# Altium PCB SAMC21_one.PcbDoc
Units mil, origin at the board's own origin, x right, y up, seen from the top; angles counter-clockwise.
Board outline 2362.2 x 1574.8 mil, 2 copper layers (Top Layer, Bottom Layer); 53 components, 42 nets, 180 pads, 43 vias.
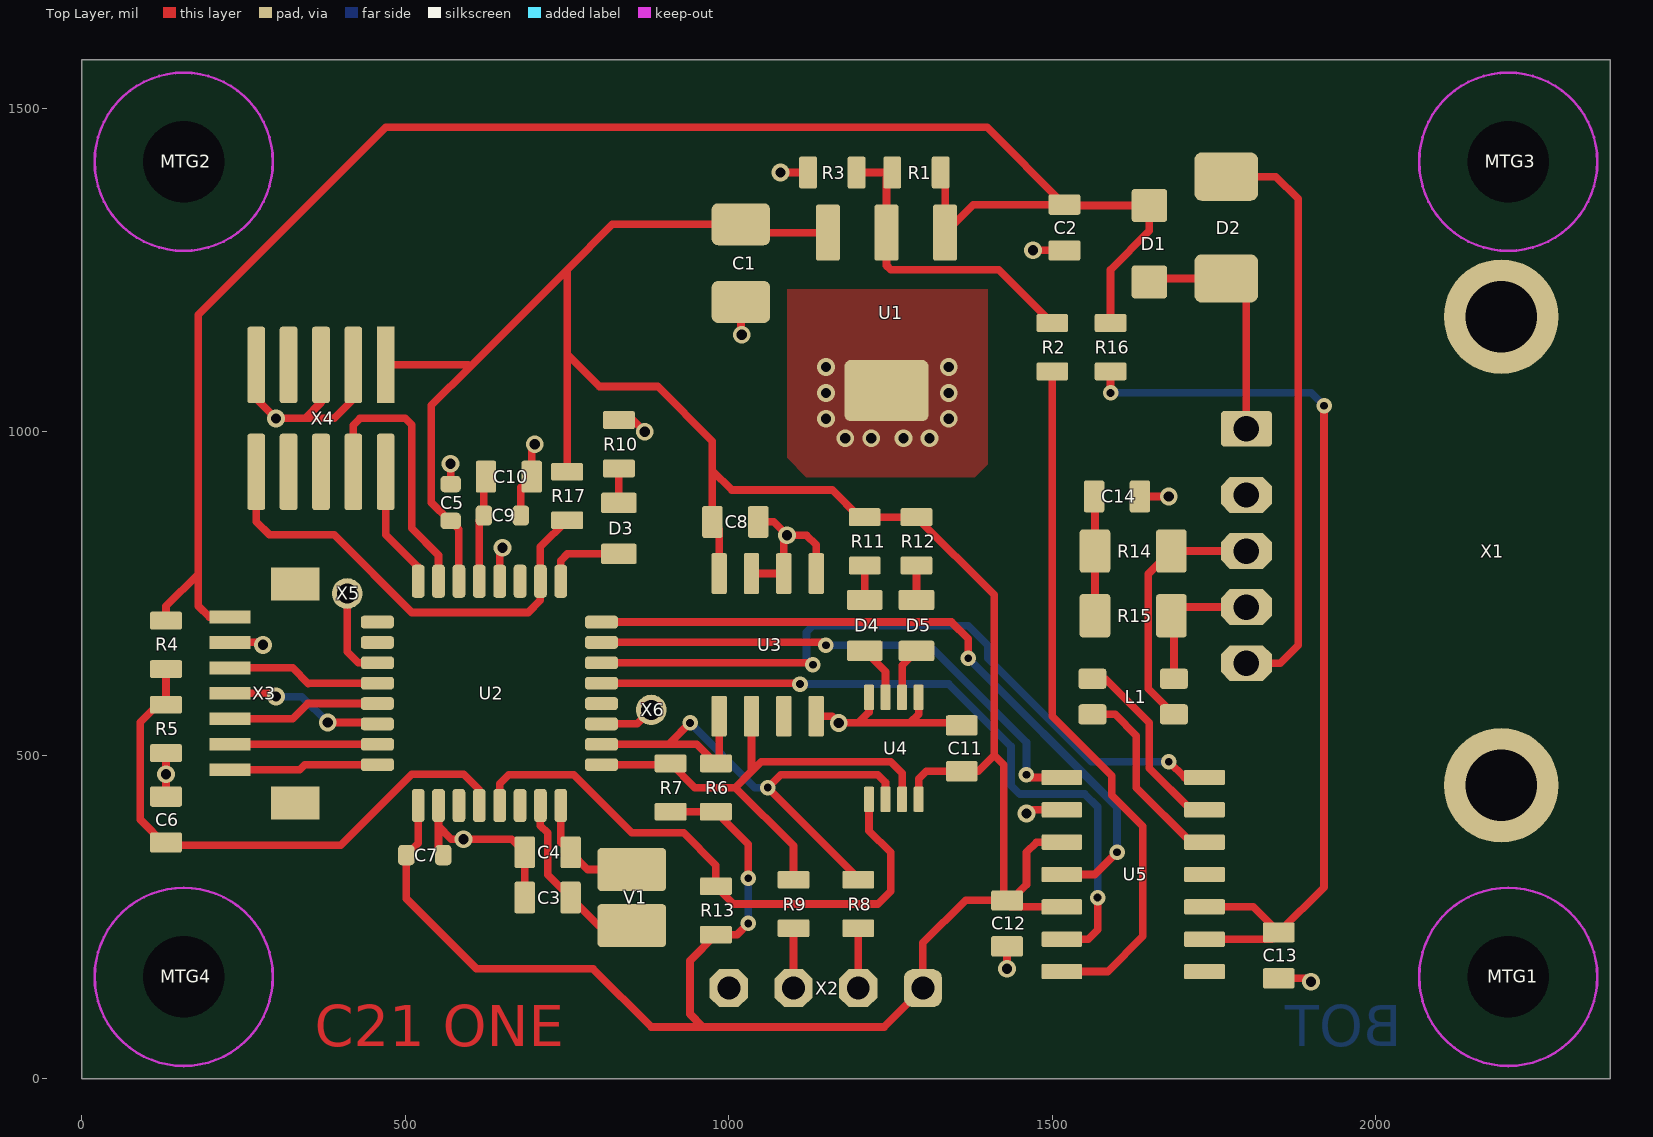
[diagram p0: Top Layer view]
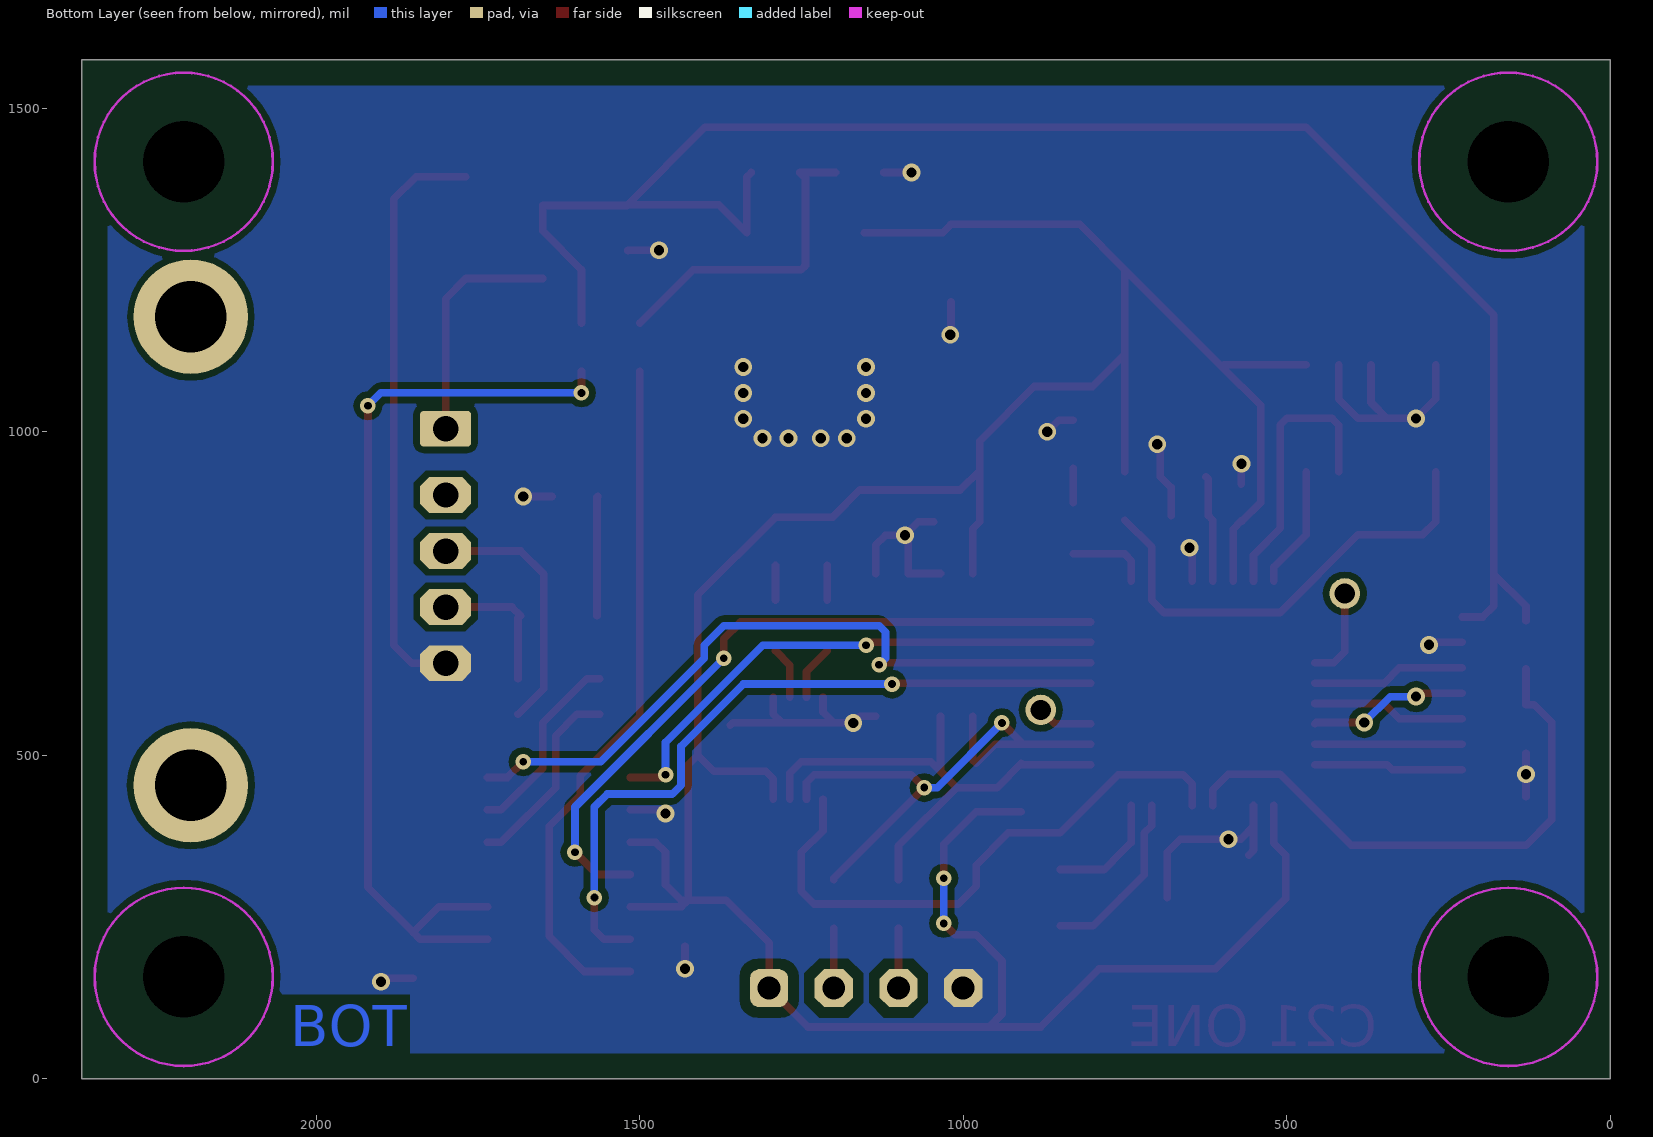
[diagram p1: Bottom Layer view, seen from below]
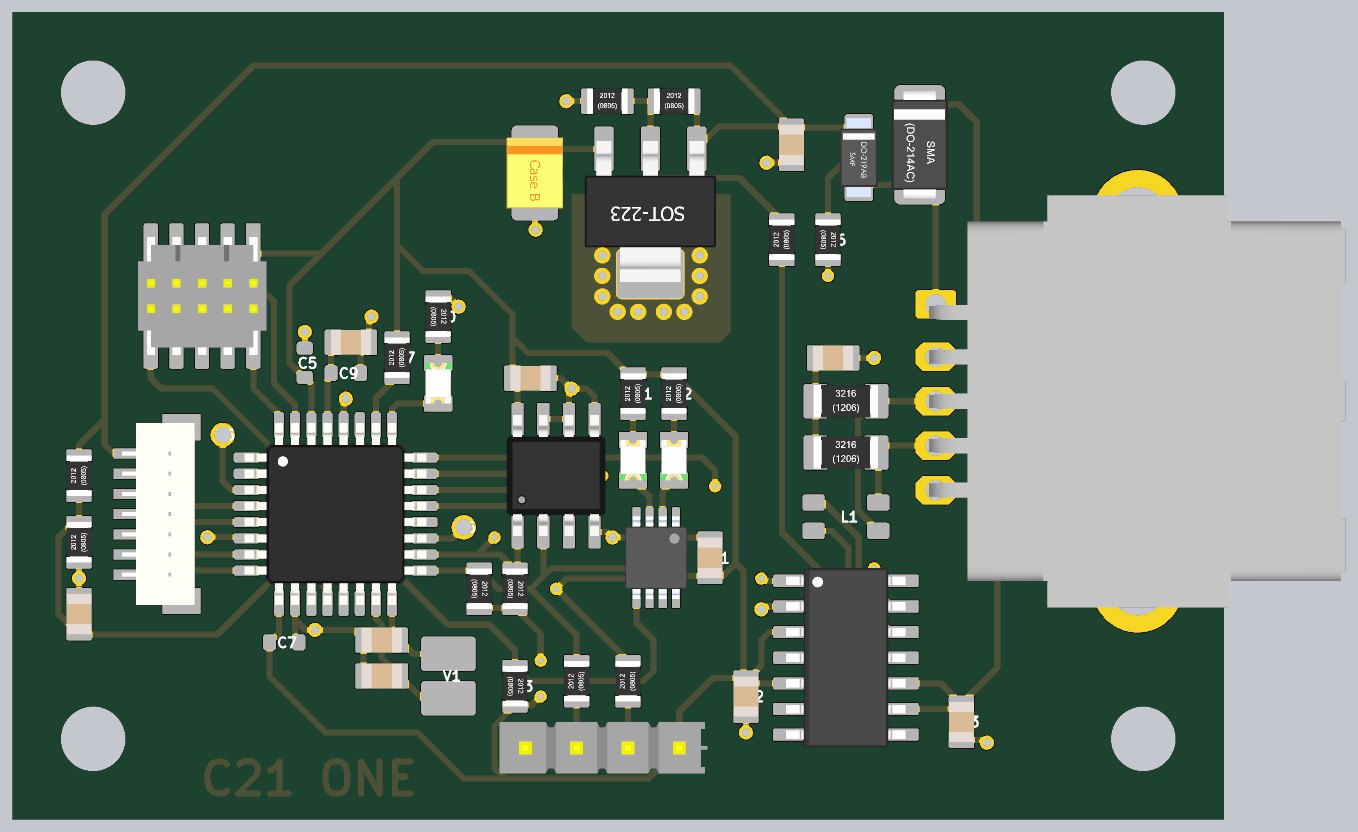
[diagram p2: 3D render of the assembled board from above, using the file's embedded part models]

## Layer stack, top to bottom
Top Solder: solder mask 0.4, Solder Resist, Dk 3.5
Top Layer: signal copper 1.4
Dielectric 1: dielectric 12.6, FR-4, Dk 4.8
Bottom Layer: signal copper 1.4
Bottom Solder: solder mask 0.4, Solder Resist, Dk 3.5

## Board outline
0,0 0,1574.8 2362.2,1574.8 2362.2,0

## Design rules (kind name [scope] priority, off if disabled: settings)
BoardOutlineClearance [All] p1: gap=39.37 ignorepadtopadclearanceinfootprint=FALSE except(59.06: THPad-OutlineEdge THPad-CavityEdge THPad-CutoutEdge THPad-SplitBarrior THPad-SplitContinuation)
Clearance [All] p1: gap=6 ignorepadtopadclearanceinfootprint=FALSE except(0: Arc-Hole Track-Hole SMDPad-Hole THPad-Hole Via-Hole Fill-Hole Poly-Hole Region-Hole Text-Hole; 10: Arc-Poly Track-Poly SMDPad-Poly THPad-Poly Via-Poly Fill-Poly Poly-Poly) // 1
HoleSize [All] p1: absolutevalues=TRUE maxlimit=472.44 minlimit=11.81 maxpercent=80.000 minpercent=20.000
MinimumSolderMaskSliver [All] p1: minsoldermaskwidth=2
PasteMaskExpansion [All] p1 off: expansion=0
PolygonConnect [All] p1: connectstyle=Direct reliefconductorwidth=16 reliefentries=4 polygonreliefangle="90 Angle" airgapwidth=10
RoutingVias [All] p1: holewidth=15.75 width=27.56 viastyle="Through Hole" minholewidth=11.81 minwidth=23.62 maxholewidth=314.96 maxwidth=393.7
SilkToBoardRegionClearance [All] p1 off:
SilkToSilkClearance [All] p1 off: silktosilkclearance=10
SilkToSolderMaskClearance [IsPad] p1 off: minsilkscreentomaskgap=10 clearancetoexposedcopper=TRUE
SolderMaskExpansion SolderMaskExpansion_VIA [IsVia] p1: expansion=2 soldermaskfromhole=TRUE
SolderMaskExpansion [All] p2: expansion=2
Width [All] p1: maxlimit=32 minlimit=8 preferedwidth=16 minimp=50.000000 maximp=50.000000 favimp=50.000000
24 further rules are at their usual default settings.

## Components (designator, comment, footprint, x,y, rotation, side; value= is the part's Value field where it differs from the comment)
C1 "tbd" CAPMP3528X21N 1018.7,1260.63 r270 top
C2 "100n/OM" CAPC2012X14L 1518.7,1315.63 r90 top
C3 "12p" CAPC2012X14L 720,280 r180 top
C4 "12p" CAPC2012X14L 720,350 r180 top
C5 "100n" CAPC1608X09L 570,890.63 r270 top
C6 "10n" CAPC2012X14L 130,400.63 r270 top
C7 "100n" CAPC1608X09L 530,345.63 r180 top
C8 "tbd" CAPC2012X14L 1010,860.63 r180 top
C9 "100n" CAPC1608X09L 650,870.63 r180 top
C10 "4µ7" CAPC2012X14L 660,930.63 r180 top
C11 "tbd" CAPC2012X14L 1360,510.63 r270 top
C12 "100n" CAPC2012X14L 1430,240 r90 top
C13 "100n" CAPC2012X14L 1850,190.63 r90 top
C14 "4n7" CAPC2012X14L 1600,900 r180 top
D1 "ES07D" DIOM2818X11N 1650,1290.63 r270 top
D2 "SMAJ36CA" DIOM5226X23N 1768.7,1315.63 r270 top
D3 "green" DIOC2012X10N 830,850.63 r270 top
D4 "tbd" DIOC2012X10N 1210,700.63 r90 top
D5 "tbd" DIOC2012X10N 1290,700.63 r90 top
L1 "ACT1210-101-2P-TL00" ACT1210 1625,590.63 r180 top
MTG1 "MH_M3" HOLE_3_2MM 2204.72,157.48 r0 top
MTG2 "MH_M3" HOLE_3_2MM 157.48,1417.32 r0 top
MTG3 "MH_M3" HOLE_3_2MM 2204.72,1417.32 r0 top
MTG4 "MH_M3" HOLE_3_2MM 157.48,157.48 r0 top
R1 "dnp" RESC2012X06L 1290,1400.63 r0 top
R2 "1k" RESC2012X06L 1500,1130.63 r90 top
R3 "dnp" RESC2012X06L 1160,1400.63 r0 top
R4 "100k" RESC2012X06L 130,670.63 r90 top
R5 "62k" RESC2012X06L 130,540.63 r90 top
R6 "tbd" RESC2012X06L 980,450 r270 top
R7 "tbd" RESC2012X06L 910,450 r270 top
R8 "tbd" RESC2012X06L 1200,270 r90 top
R9 "tbd" RESC2012X06L 1100,270 r90 top
R10 "1k" RESC2012X06L 830,980.63 r270 top
R11 "1k" RESC2012X06L 1210,830.63 r90 top
R12 "1k" RESC2012X06L 1290,830.63 r90 top
R13 "tbd" RESC2012X06L 980,260 r270 top
R14 "62R" RESC3216X07N 1625,815.63 r0 top
R15 "62R" RESC3216X07N 1625,715.63 r0 top
R16 "1k" RESC2012X06L 1590,1130.63 r270 top
R17 "10k" RESC2012X06L 750,900.63 r90 top
U1 "TLE4266-2G" SOT230P700X180-4N 1243.7,1185.63 r270 top
U2 "ATSAMC21E18A-AU" TQFP80P900X900X120-32N 630,595.63 r0 top
U3 "AT30TSE754ASS8M" SOIC127P600X175-8N 1060,670.63 r90 top
U4 "PCA9530D" TSOP65P640X120-8N 1255,510.63 r270 top
U5 "TJA1043" SOIC127P600X175-14N 1625,315.63 r0 top
V1 "16MHz" NX3225Gx 850,280 r270 top
X1 "MX34005" MX34005 1800,815.63 r270 top
X2 "1x4 2,54mm" PINH_1x04_2_54mm 1150,140 r180 top
X3 "BM07B-SRSS-TB" BM07B-SRSS-TB 280,595.63 r270 top
X4 "SWD" FTSH-105-01-L-DV-K 370,1020.63 r180 top
X5 "0.35mm²" PAD035X160 410,750 r0 top
X6 "0.35mm²" PAD035X160 880,570 r0 top

## Footprints (in the part's own frame and the unit in brackets; to place one, negate y for a bottom-side part, rotate by r counter-clockwise, add the part's x,y. Pads: shape width x height; smd on the part's side, far side on the other; paste and mask are expansions set on the pad)
ACT1210 [mm]
  rrect30% 1.1x0.8 smd: 1(-1.6,0.7) 2(-1.6,-0.7) 3(1.6,-0.7) 4(1.6,0.7)
  body extent -1.6,-1.3 1.6,1.3, height 2.5
BM07B-SRSS-TB [mm] "1.0mm pitch/Disconnectable Crimp style connector"
  rect 0.5x1.6 smd: 1(-3,-1.3) 2(-2,-1.3) 3(-1,-1.3) 4(0,-1.3) 5(1,-1.3) 6(2,-1.3) 7(3,-1.3)
  rect 1.3x1.9 smd: M(-4.3,1.262) M(4.3,1.262)
  body extent -4.5,-1.69 4.5,1.91, height 4.32
CAPC1608X09L [mm] "Chip Capacitor, 2-Leads, Body 1,6x0,8mm, IPC High Density"
  rrect50% 0.65x0.8 smd: 1(-0.725,0) 2(0.725,0)
  body extent -0.8,-0.4 0.8,0.4, height 0.9
CAPC2012X14L [mm] "Chip Capacitor, 2-Leads, Body 2,0x1,3mm, IPC High Density"
  rrect20% 0.8x1.25 smd: 1(-0.9,0) 2(0.9,0)
  body extent -1,-0.62 1,0.62, height 0.6
CAPMP3528X21N [mm] "Molded Capacitor, 2-Leads, Body 3,5x2,8mm, IPC Medium Density"
  rrect30% 1.65x2.3 smd: 1(-1.525,0) 2(1.525,0)
  body extent -1.75,-1.4 1.75,1.4, height 1.9
DIOC2012X10N [mm] "Chip Diode, 2-Leads, Body 2,0x1,3mm, IPC Medium Density"
  rrect20% 0.8x1.4 smd: 1(-1,0) 2(1,0)
  body extent -1,-0.62 1,0.63, height 0.7
DIOM2818X11N [mm] "Molded Diode, 2-Leads, Body 2,80x1,80mm, IPC Medium Density"
  rrect20% 1.3x1.4 smd: 1(-1.5,0) 2(1.5,0)
  body extent -1.95,-0.95 1.95,0.95, height 1.25
DIOM5226X23N [mm] "Molded Diode, 2-Leads, Body 5.2x2.6mm, IPC Medium Density"
  rrect30% 1.9x2.5 smd: 1(-2,0) 2(2,0)
  body extent -2.75,-1.4 2.75,1.4, height 2.6
FTSH-105-01-L-DV-K [mm] "SAMTEC FTSH 5pin doppelreihig, 1,27mm x 1,27mm"
  rect 0.7x3 smd: 1(-2.53,-2.1)
  rrect30% 0.7x3 smd: 2(-2.53,2.1) 3(-1.26,-2.1) 4(-1.26,2.1) 5(0.01,-2.1) 6(0.01,2.1) 7(1.28,-2.1) 8(1.28,2.1) 9(2.55,-2.1) 10(2.55,2.1)
  body extent -3.17,-2.92 3.18,2.92, height 6.11
HOLE_3_2MM [mm] "Mouting-Hole for screws M3 with keepout for washer"
  round 0 hole 3.2 unplated: 1(0,0)
  Keep-Out Layer circle w0.1: c0,0 r3.5
MX34005 [mm] "MX34005"
  round 4.5 hole 2.8: 0(-9.2,10) 0(9.2,10)
  rrect20% 1.4x2 hole 1: 1(-4.8,0)
  oct 1.4x2 hole 1: 2(-2.2,0) 3(0,0) 4(2.2,0) 5(4.4,0)
  body extent -10.2,-0.34 10.2,20.28, height 10.7
NX3225Gx [mm] "Quartz Crystal Units NX3225Gx for Automotive, 2-Leads, Body 3.2x2.5mm, IPC Medium Density"
  rrect20% 1.7x2.7 smd: 1(-1.1,0) 2(1.1,0)
  body extent -1.7,-1.3 1.7,1.3, height 1
PAD035X160 [mm] "PAD 0.35mm² rund"
  round 1.2 hole 0.8: 1(0,0)
PINH_1x04_2_54mm [mm] "Pin-Header 4 polig"
  rrect50% 1.5x1.5 hole 0.9: 1(-3.81,0)
  oct 1.5x1.5 hole 0.9: 2(-1.27,0) 3(1.27,0) 4(3.81,0)
  body extent -5.21,-1.27 5.08,1.27, height 8.38
RESC2012X06L [mm] "Chip Resistor, 2-Leads, Body 2,0x1,3mm, IPC High Density"
  rrect20% 0.7x1.25 smd: 1(-0.95,0) 2(0.95,0)
  body extent -1,-0.62 1,0.62, height 0.45
RESC3216X07N [mm] "Chip Resistor, 2-Leads, Body 3,1x1,6mm, IPC Medium Density"
  rrect20% 1.2x1.7 smd: 1(-1.5,0) 2(1.5,0)
  body extent -1.6,-0.8 1.6,0.8, height 0.55
SOIC127P600X175-8N [mm] "SOIC, 8-Leads, Body 5,0x4,0mm (max), Pitch 1,27mm, IPC Medium Density"
  rrect20% 1.6x0.6 smd: 1(-2.8,1.905) 2(-2.8,0.635) 3(-2.8,-0.635) 4(-2.8,-1.905) 5(2.8,-1.905) 6(2.8,-0.635) 7(2.8,0.635) 8(2.8,1.905)
  body extent -3,-2.45 3,2.45, height 1.7
SOIC127P600X175-14N [mm] "SOIC, 14-Leads, Body 8.73x3.98mm, Pitch 1.27mm, IPC Medium Density"
  rrect20% 1.6x0.6 smd: 1(-2.8,3.81) 2(-2.8,2.54) 3(-2.8,1.27) 4(-2.8,0) 5(-2.8,-1.27) 6(-2.8,-2.54) 7(-2.8,-3.81) 8(2.8,-3.81) 9(2.8,-2.54) 10(2.8,-1.27) 11(2.8,0) 12(2.8,1.27) 13(2.8,2.54) 14(2.8,3.81)
  body extent -2.99,-4.45 2.99,4.45, height 1.75
SOT230P700X180-4N [mm] "SOT223, 4-Leads, Body 6,7x7,3mm (max), Pitch 2,30mm, IPC Medium Density"
  rrect20% 2.2x0.95 smd: 1(-3.1,2.3) 2(-3.1,0) 3(-3.1,-2.3)
  rrect20% 2.4x3.3 smd: 4(3.1,0)
  body extent -3.48,-3.25 3.48,3.25, height 1.65
TQFP80P900X900X120-32N [mm] "TQFP, 32-Leads, Body 9,3x9,3mm (max), Pitch 0,80mm, IPC Medium Density"
  rrect50% 1.3x0.5 smd: 1(-4.4,2.8) 2(-4.4,2) 3(-4.4,1.2) 4(-4.4,0.4) 5(-4.4,-0.4) 6(-4.4,-1.2) 7(-4.4,-2) 8(-4.4,-2.8) 17(4.4,-2.8) 18(4.4,-2) 19(4.4,-1.2) 20(4.4,-0.4) 21(4.4,0.4) 22(4.4,1.2) 23(4.4,2) 24(4.4,2.8)
  rrect50% 0.5x1.3 smd: 9(-2.8,-4.4) 10(-2,-4.4) 11(-1.2,-4.4) 12(-0.4,-4.4) 13(0.4,-4.4) 14(1.2,-4.4) 15(2,-4.4) 16(2.8,-4.4) 25(2.8,4.4) 26(2,4.4) 27(1.2,4.4) 28(0.4,4.4) 29(-0.4,4.4) 30(-1.2,4.4) 31(-2,4.4) 32(-2.8,4.4)
  body extent -4.5,-4.5 4.5,4.5, height 1.4
TSOP65P640X120-8N [mm] "TSOP, 8-Leads, Body 3,00x4,40mm, Pitch 0,65mm, IPC Medium Density"
  rrect30% 1x0.4 smd: 1(-2,0.975) 2(-2,0.325) 3(-2,-0.325) 4(-2,-0.975) 5(2,-0.975) 6(2,-0.325) 7(2,0.325) 8(2,0.975)
  body extent -2.05,-1.55 2.05,1.55, height 1.1

## Part data
C1: library part CAPMP_B, "Tantalkondensator SMD Bauform B", Bauteilart=Kondensator, Ersteller=rriedel, Freigabe=tested, Kategorie=generisch, PackageDescription="Tantal B", Part Number=CAPMP_B, Unterart=gepolt
C2 C3 C4 C6 C8 C10 C11 C12 C13 C14: library part CAPC_0805, "0805 Chip Capacitor", Bauteilart=Kondensator, Ersteller=rriedel, Freigabe=tested, Kategorie=generisch, PackageDescription=0805, Part Number=CAPC_0805, Unterart=ungepolt
C5 C7 C9: library part CAPC_0603, "0603 Chip Capacitor", Bauteilart=Kondensator, Ersteller=rriedel, Freigabe=tested, Kategorie=generisch, PackageDescription=0603, Part Number=CAPC_0603, Unterart=ungepolt
D1: "Ultrafast Rectifier Surface Mount,  IF 0.5A, VR 100V, DO-219AB, AEC-Q101", Bauteilart=Diode, Erstelldatum=09.10.2013, Ersteller=rriedel, Freigabe=tested, Hersteller=Vishay, Hersteller_Code_1=ES07D, Kategorie=Bauteil, PackageDescription=DO-219AB, Part Number=ES07D, Unterart=Rectifier
D2: "Transildiode Bidirectional 400W 36V", Bauteilart=Diode, Erstelldatum=15.09.2016, Ersteller=rriedel, Freigabe=tested, Hersteller=DIODES, Hersteller_Code_1=SMAJ36CA-13-F, Kategorie=Bauteil, PackageDescription=SMA, Part Number=SMAJ36CA, Unterart=Transil
D3 D4 D5: library part LED_0805, "LED, 0805", Bauteilart=Diode, Erstelldatum=25.07.2017, Ersteller=rriedel, Freigabe=tested, Kategorie=generisch, PackageDescription=0805, Part Number=LED_0805
L1: "Common Mode Filter,  -50°C ... +150°C, AEC-Q200", Bauteilart=Spule, Distributor_1=Farnell, Distributor_1_Part_Number=2442838, Distributor_2=Digi-Key, Distributor_2_Part_Number=445-172386-1-ND, Erstelldatum=17.10.2017, Ersteller=rriedel, Freigabe=tested, Hersteller=TDK, Hersteller_Code_1=ACT1210-101-2P-TL00, Kategorie=Bauteil, PackageDescription=3225, Part Number=ACT1210-101-2P-TL00, Unterart=Filter
MTG1 MTG2 MTG3 MTG4: "Mounting-Hole for M3 screws", Bauteilart=Mechanic, Erstelldatum=13.05.2018, Ersteller=rriedel, Freigabe=tested, Kategorie=No_Bom, Part Number=MH_M3, Unterart=Holes
R1 R2 R3 R4 R5 R6 R7 R8 R9 R10 R11 R12 R13 R16 R17: library part RESC_0805, "0805 Chip Resistor", Bauteilart=Widerstand, Ersteller=rriedel, Freigabe=tested, Kategorie=generisch, PackageDescription=0805, Part Number=RESC_0805, Unterart=Standard
R14 R15: library part RESC_1206, "1206 Chip Resistor", Bauteilart=Widerstand, Ersteller=rriedel, Freigabe=tested, Kategorie=generisch, PackageDescription=1206, Part Number=RESC_1206, Unterart=Standard
U1: "150 mA LDO, Vout = 5,0V, 2%, Enable", Bauteilart=IC, Distributor_1=Digi-Key, Distributor_2=Farnell, Erstelldatum=31.03.2019, Ersteller=rriedel, Freigabe=tested, Hersteller=Infineon, Hersteller_Code_1=TLE4266-2G, Kategorie=Bauteil, PackageDescription=SOT223, Part Number=TLE4266-2G, Unterart=Linear-Regulators
U2: "32-bit Microcontroller, 48MHz Cortex M0, 256k FLASH,  1x CAN-FD, -40…85°C", Bauteilart=MikroController, Erstelldatum=11.08.2018, Ersteller=rriedel, Freigabe=tested, Hersteller=Microchip, Hersteller_Code_1=ATSAMC21E18A-AU, Kategorie=Bauteil, PackageDescription=TQFP32, Part Number=ATSAMC21E18A-AU, Unterart="32bit Microchip"
U3: "I2C Digital Temperature Sensor and EEPROM", Bauteilart=IC, Erstelldatum=11.08.2018, Ersteller=rriedel, Freigabe=tested, Hersteller=Microchip, Hersteller_Code_1=AT30TSE754ASS8M, Kategorie=Bauteil, PackageDescription=SO8, Part Number=AT30TSE754ASS8M, Unterart=Memory
U4: "2-bit I2C LED dimmer", Bauteilart=IC, Erstelldatum=11.08.2018, Ersteller=rriedel, Freigabe=tested, Hersteller=NXP, Hersteller_Code_1=PCA9530D, Kategorie=Bauteil, PackageDescription=TSSOP-8, Part Number=PCA9530D, Unterart=LED-Driver
U5: library part TJA1043T, "HS Can Transceiver with wake-up Tvj= -40 to 150 °C", Bauteilart=IC, Erstelldatum=10.10.2012, Ersteller=rriedel, Freigabe=tested, Hersteller=NXP, Hersteller_Code_1=TJA1043T, Kategorie=Bauteil, PackageDescription=SO14, Part Number=TJA1043T, Unterart=Interface
V1: library part NX3225GB-16.000000MHZ, "16.000MHz Crystal SMD, 3.2x2.5mm, 8pF, 50ppm,  -40..+150°C", Bauteilart=Quarz, Distributor_1=Digi-Key, Distributor_1_Part_Number=644-1233-1-ND, Distributor_2=Frischer, Erstelldatum=22.10.2015, Ersteller=rriedel, Freigabe=tested, Hersteller=NDK, Hersteller_Code_1=NX3225GB-16M-STD-CRA-2, Kategorie=Bauteil, PackageDescription="NX3225Gx 3,2mm x 2,5mm", Part Number=NX3225GB-16.000000MHZ, Unterart="NX3225GB automotive"
X1: "PCB Header, Automotive, single row, 5 pins", Bauteilart=Steckverbinder, Erstelldatum=03.06.2018, Ersteller=rriedel, Freigabe=tested, Hersteller=JAE, Kategorie=Bauteil, PackageDescription=MX34005, Part Number=MX34005, Unterart=MX34
X2: library part PINH_1x4_2_54, "Pin-Header 2,54 mm 4pins", Bauteilart=Steckverbinder, Erstelldatum=02.02.2017, Ersteller=rriedel, Freigabe=tested, Kategorie=generisch, Part Number=PINH_1x4_2_54, Unterart=Stiftleisten
X3: library part SM07B-SRSS-TB, "JST PCB Header SH, 7pins, 1,0mm, -25°C to +85°C", Bauteilart=Steckverbinder, Distributor_1=RS, Distributor_1_Part_Number=546-8798, Distributor_2=Digi-Key, Distributor_2_Part_Number=455-1793-1-ND, Erstelldatum=20.04.2018, Ersteller=rriedel, Freigabe=tested, Hersteller=JST, Hersteller_Code_1=BM07B-SRSS-TB, Kategorie=Bauteil, PackageDescription=SH-7, Part Number=SM07B-SRSS-TB, Unterart="JST SH"
X4: "ARM Debug-Header 2x5 1,27 mm", Bauteilart=Steckverbinder, Erstelldatum=12.08.2018, Ersteller=rriedel, Freigabe=tested, Kategorie=Bauteil, PackageDescription="2x5 1,27mm", Part Number=SWD, Unterart=Debug
X5 X6: library part PAD035, "Wire pad 0,35mm²", Bauteilart=PAD, Erstelldatum=15.01.2014, Ersteller=rriedel, Freigabe=tested, Kategorie=generisch, Part Number=PAD035

## Via types
v1: diameter 27.56, hole 15.75, Top Layer to Bottom Layer, 29 vias
v2: diameter 24, hole 12, Top Layer to Bottom Layer, 14 vias

## Nets (pads, with @x,y where several pads share a name; then routed paths per layer and width w, separated by ;. In a path a pad name is that pad's centre, name@x,y a point inside that pad or via, vN(x,y) a via of type N, cw(c..) or ccw(c..) an arc to the next point about the centre after c; other vN are vias at no path point)
5V: C1.1 C5.2 C7.2 C8.2 C11.2 C12.2 R6.2 R7.2 R11.2 R12.2 R13.2 R17.2 U1.3 U2.9 U2.30 U3.8 U4.8 U5.3 U5.5 X2.1 X4.1 | length 5132.2
  Top Layer w11.81: X4.1 597.32,1103.31 600,1100.63 ; U2.9 519.76,363.94 C7.2 501.46,278.54 610,170 790,170 880,80 960,80 ; U2.30 582.76,849.33 C5.2 568.54,862.09 540,890.63 540,1040.63 600,1100.63 ; R17.2 750,1120 ; R7.2 R6.2 1030,362.6 v2(1030,310) ; U3.8 985,850.2 C8.2 974.57,940 ; v2(1030,240) 1012.6,222.6 R13.2 940,182.6 940,100 960,80 ; U1.3 1031.69,1307.68 C1.1 820.04,1320.67 750,1250.63 ; U4.8 1293.39,463.39 1305.2,475.2 C11.2 1385.2,475.2 1410,500 ; U5.5 1435.43,265.63 C12.2@1425,276.06 ; U5.3 1475.63,365.63 1460,350 1460,300 1436.06,276.06 C12.2@1425,276.06 ; 600,1100.63 750,1250.63 ; 750,1120 750,1250.63 ; 750,1120 800,1070 890,1070 974.57,985.43 974.57,940 ; 960,80 1240,80 X2.1 1300,210 1366.06,276.06 C12.2@1425,276.06 ; 974.57,940 1004.57,910 1160,910 1201.97,868.03 R11.2 R12.2 1410,748.03 1410,500 ; 1410,500 1425,485 C12.2@1425,276.06
  Bottom Layer w11.81: v2(1030,240) v2(1030,310)
12V: C2.2 D1.1 R1.2 R4.2 R16.1 U1.1 X3.1 | length 2743.4
  Top Layer w11.81: R4.2 130,730 180,780 ; X3.1 196.89,713.74 180,730.63 180,780 ; R1.2 1334.25,1393.78 U1.1 1377.64,1351.06 C2.2 ; R16.1 1590,1250.63 1650,1310.63 D1.1 1520.08,1349.68 C2.2 ; 180,780 180,1180.63 470,1470.63 1399.13,1470.63 C2.2
CAN_EN_1: U2.21 U5.6 | length 1132.4
  Top Layer w11.81: U2.21 1108.62,611.38 v2(1110,610) ; U5.6 1555.63,215.63 1570,230 v2(1570,280)
  Bottom Layer w11.81: v2(1110,610) 1340,610 1436.09,513.91 1436.09,453.91 1450,440 1550,440 1570,420 v2(1570,280)
CAN_RX_1: U2.24 U5.4 | length 1102.2
  Top Layer w11.81: U2.24 1344.13,705.87 1370,680 v2(1370,650) ; U5.4 1565.63,315.63 v2(1600,350)
  Bottom Layer w11.81: v2(1370,650) 1600,420 v2(1600,350)
CAN_STB_1: U2.22 U5.14 | length 1110.3
  Top Layer w11.81: U2.22 1127.13,642.87 v2(1130,640) ; v2(1680,490) 1704.37,465.63 U5.14
  Bottom Layer w11.81: v2(1130,640) 1120,650 1120,690 1130,700 1370,700 1400,670 1400,650 1560,490 v2(1680,490)
CAN_TX_1: U2.23 U5.1 | length 827.3
  Top Layer w11.81: U2.23 1145.63,674.37 v2(1150,670) ; v2(1460,470) 1464.37,465.63 U5.1
  Bottom Layer w11.81: v2(1150,670) 1310,670 1460,520 v2(1460,470)
CS_TFT: U2.6 X3.4 | length 247.5
  Top Layer w11.81: X3.4 295,595.63 v1(300,590.63) ; v1(380,550.63) 454.53,550.63 U2.6
  Bottom Layer w11.81: v1(300,590.63) 340,590.63 v1(380,550.63)
GND: C1.2 C2.1 C3.2 C4.2 C5.1 C6.1 C7.1 C8.1 C9.1 C10.1 C11.1 C12.1 C13.1 C14.1 D2.1 R3.1 R5.1 R10.1 U1.4 U2.10 U2.28 U3.4 U3.5 U3.6 U3.7 U4.1 U4.4 U5.2 X1.5 X2.4 X3.2 X4.3 X4.5 X4.9 | length 2863.7
  Top Layer w11.81: C6.1 v1(130,470.63) R5.1 ; X3.2 276.26,674.37 v1(280,670.63) ; X4.9 269.6,1051.03 v1(300,1020.63) 345,1020.63 ; X4.5 369.6,1045.23 345,1020.63 ; X4.3 419.6,1050.23 390,1020.63 345,1020.63 ; U2.10 551.26,390 ; C7.1 551.26,352.91 551.26,390 ; C5.1 v1(570,950.63) ; U2.28 645.75,816.38 v1(650,820.63) ; C9.1 678.54,913.74 C10.1 695.43,976.06 v1(700,980.63) ; C3.2 C4.2 664.57,370 v1(590,370) 571.26,370 551.26,390 ; R10.1 851.97,1018.03 v1(870,1000) ; C1.2 1018.7,1151.3 v1(1020,1150) ; U3.7 U3.6 1085,835 v1(1090,840) ; C8.1 1069.37,860.63 v1(1090,840) ; v1(1080,1400.63) R3.1 ; U3.4 1159.61,560.39 v1(1170,550) 1200,550 ; U3.5 1135,825 1120,840 v1(1090,840) ; U4.4 1216.61,566.61 1200,550 ; U4.1 1293.39,563.39 1280,550 ; C11.1 1356.06,550 1280,550 ; v1(1430,170) C12.1 ; v1(1460,410) 1465.63,415.63 U5.2 ; v1(1470,1280.63) 1518.27,1280.63 C2.1 ; C14.1 v1(1680,900) ; D2.1 1845.63,1394.37 1880,1360 1880,670 1852.4,642.4 X1.5 ; C13.1 1894.8,155.2 v1(1900,150) ; 1200,550 1280,550
  other v1: 1180,990 1220,990 1270,990 1310,990 1150,1020 1340,1020 1150,1060 1340,1060 1150,1100 1340,1100
I2C_OE: U2.14
I2C_Reset: R13.1 U2.13 U4.5 | length 909.4
  Top Layer w11.81: U2.13 645.75,455.75 660,470 760,470 850,380 930,380 980,330 R13.1 1007.4,270 1230,270 1250,290 1250,350 1216.61,383.39 U4.5
KL30: D1.2 D2.2 X1.1 | length 363.9
  Top Layer w11.81: D1.2@1650,1236.89 D2.2 1800,1205.59 X1.1
LED: D3.2 U2.25 | length 126.1
  Top Layer w11.81: U2.25 740.24,800.87 750.63,811.26 D3.2
MISO: U2.5 X3.5 | length 237.7
  Top Layer w11.81: X3.5 325.63,556.26 349.25,579.88 U2.5
MOSI: U2.7 X3.6 | length 228
  Top Layer w11.81: X3.6 U2.7
NetC3_1: C3.1 U2.15 V1.2 | length 274.2
  Top Layer w11.81: U2.15 708.74,391.26 720,380 720,315.43 C3.1 798.74,236.69 V1.2
NetC4_1: C4.1 U2.16 V1.1 | length 184.3
  Top Layer w11.81: U2.16 740.24,365.2 C4.1 782.13,323.31 V1.1
NetC6_2: C6.2 R4.1 R5.2 U2.12 | length 877
  Top Layer w11.81: R4.1 R5.2 117.4,578.03 90,550.63 90,400.63 130,360.63 400,360.63 510,470.63 590,470.63 614.25,446.38 U2.12
NetC9_2: C9.2 C10.2 U2.29 | length 166
  Top Layer w11.81: U2.29 614.25,863.43 C9.2 621.46,927.52 C10.2
NetC13_2: C13.2 R16.2 U5.9 U5.10 | length 1464.7
  Top Layer w11.81: v2(1590,1060) R16.2 ; U5.9 1839.57,215.63 C13.2 ; U5.10 1810.43,265.63 C13.2 ; v2(1920,1040) 1920,296.06 C13.2
  Bottom Layer w11.81: v2(1590,1060) 1900,1060 v2(1920,1040)
NetC14_2: C14.2 R14.1 R15.1 | length 184.9
  Top Layer w11.81: C14.2 1565.94,898.62 R14.1 R15.1
NetD3_1: D3.1 R10.2 | length 53.2
  Top Layer w11.81: D3.1 R10.2
NetD4_1: D4.1 U4.3 | length 85.2
  Top Layer w11.81: D4.1 1242.2,629.06 U4.3
NetD4_2: D4.2 R11.1 | length 53.2
  Top Layer w11.81: D4.2 R11.1
NetD5_1: D5.1 U4.2 | length 81.1
  Top Layer w11.81: U4.2 1267.8,639.05 D5.1
NetD5_2: D5.2 R12.1 | length 53.2
  Top Layer w11.81: D5.2 R12.1
NetL1_3: L1.3 U5.13 | length 298.1
  Top Layer w11.81: L1.3 1581.81,618.19 1650,550 1650,480 1714.37,415.63 U5.13
NetL1_4: L1.4 U5.12 | length 301.9
  Top Layer w11.81: L1.4 1596.93,563.07 1630,530 1630,450 1714.37,365.63 U5.12
NetR1_1: R1.1 R2.2 R3.2 U1.2 | length 495.7
  Top Layer w11.81: R3.2 R1.1 1243.7,1391.73 U1.2 1243.7,1256.93 1250,1250.63 1417.4,1250.63 R2.2
NetR8_1: R8.1 X2.2 | length 92.6
  Top Layer w11.81: X2.2 R8.1
NetR9_1: R9.1 X2.3 | length 92.6
  Top Layer w11.81: X2.3 R9.1
NetU2_3: U2.3 X5.1 | length 143.9
  Top Layer w11.81: X5.1 410,660 427.13,642.87 U2.3
PD_TFT: U2.4 X3.3 | length 238.4
  Top Layer w11.81: X3.3 325.63,635 350,610.63 350.75,611.38 U2.4
PowerEnable: R2.1 U5.7 | length 1079
  Top Layer w11.81: R2.1 1500,560 1591.66,468.34 1591.66,438.34 1640,390 1640,220 1585.63,165.63 U5.7
PWM: U2.19 X6.1 | length 85.7
  Top Layer w11.81: U2.19 858.39,548.39 X6.1
RESETN: R17.1 U2.26 X4.10 | length 722.9
  Top Layer w11.81: X4.10 269.6,861.03 290,840.63 390,840.63 510,720.63 690,720.63 708.74,739.37 U2.26 708.74,821.97 R17.1
SCK: U2.8 X3.7 | length 231.2
  Top Layer w11.81: X3.7 336.89,477.52 344.76,485.39 U2.8
SCL: R6.1 R8.2 U2.18 U3.1 U4.6 | length 893
  Top Layer w11.81: U2.18 910,516.89 ; v2(940,550) 910,520 910,516.89 ; U3.1 985,492.4 R6.1 950.51,516.89 910,516.89 ; R8.2 1200,310 v2(1060,450) 1080,470 1230,470 1242.2,457.8 U4.6
  Bottom Layer w11.81: v2(940,550) 1040,450 v2(1060,450)
SDA: R7.1 R9.2 U2.17 U3.2 U4.7 | length 810.4
  Top Layer w11.81: U2.17 907.99,485.39 R7.1 947.4,450 1010,450 ; U3.2 1035,475 ; R9.2 1100,360 1010,450 ; U4.7 1267.8,472.2 1250,490 1050,490 1035,475 ; 1010,450 1035,475
SWCLK: U2.31 X4.4 | length 430
  Top Layer w11.81: X4.4 419.6,1010.23 430,1020.63 500,1020.63 510,1010.63 510,850.63 551.26,809.37 U2.31
SWDIO: U2.32 X4.2 | length 189.9
  Top Layer w11.81: X4.2 469.6,841.03 519.76,790.87 U2.32
X_CAN_H: L1.2 R15.2 X1.4 | length 220.6
  Top Layer w11.81: L1.2 1687.99,711.69 R15.2 1697.44,729.02 X1.4
X_CAN_L: L1.1 R14.2 X1.3 | length 399.6
  Top Layer w11.81: L1.1 1648.53,602.54 1648.53,780.1 R14.2 X1.3
pads on no net: MTG1.1 MTG2.1 MTG3.1 MTG4.1 U2.1 U2.2 U2.11 U2.20 U2.27 U3.3 U5.8 U5.11 X1.0 X1.2 X3.M X4.6 X4.7 X4.8

## Polygon pours and split planes (outlines as drawn)
GND on Top Layer "GND_L01_P000" (solid, remove dead copper, pour order 0): 1090,1220 1090,960 1120,930 1380,930 1400,950 1400,1220
GND on Bottom Layer "GND_L02_P002" (solid, remove dead copper, pour order 2): 0,1570 0,0 2360,0 2360,1580

## Other copper
Top Layer:
  text "C21 ONE" at 360,50 h62.99
Bottom Layer:
  text "BOT" at 2040,50 h62.99

## Silkscreen, mask and mechanical layers (free items; w line width, h text height)
M1_Dimension:
  the board outline again, w19.68

## Dimensions
2362.2,0 to 2362.2,1574.8 on M2_Measures
0,1574.8 to 2362.2,1574.8 on M2_Measures